# Altium PCB PCB1.PcbDoc
Units mm, origin at the board's own origin, x right, y up, seen from the top; angles counter-clockwise.
Board outline 39.6 x 42.1 mm, 4 copper layers (Top Layer, GND, VCC, Bottom Layer), stack 0.603 mm thick; 49 components, 43 nets, 249 pads, 94 vias.
Unrouted connection lines stored in the file: 155.
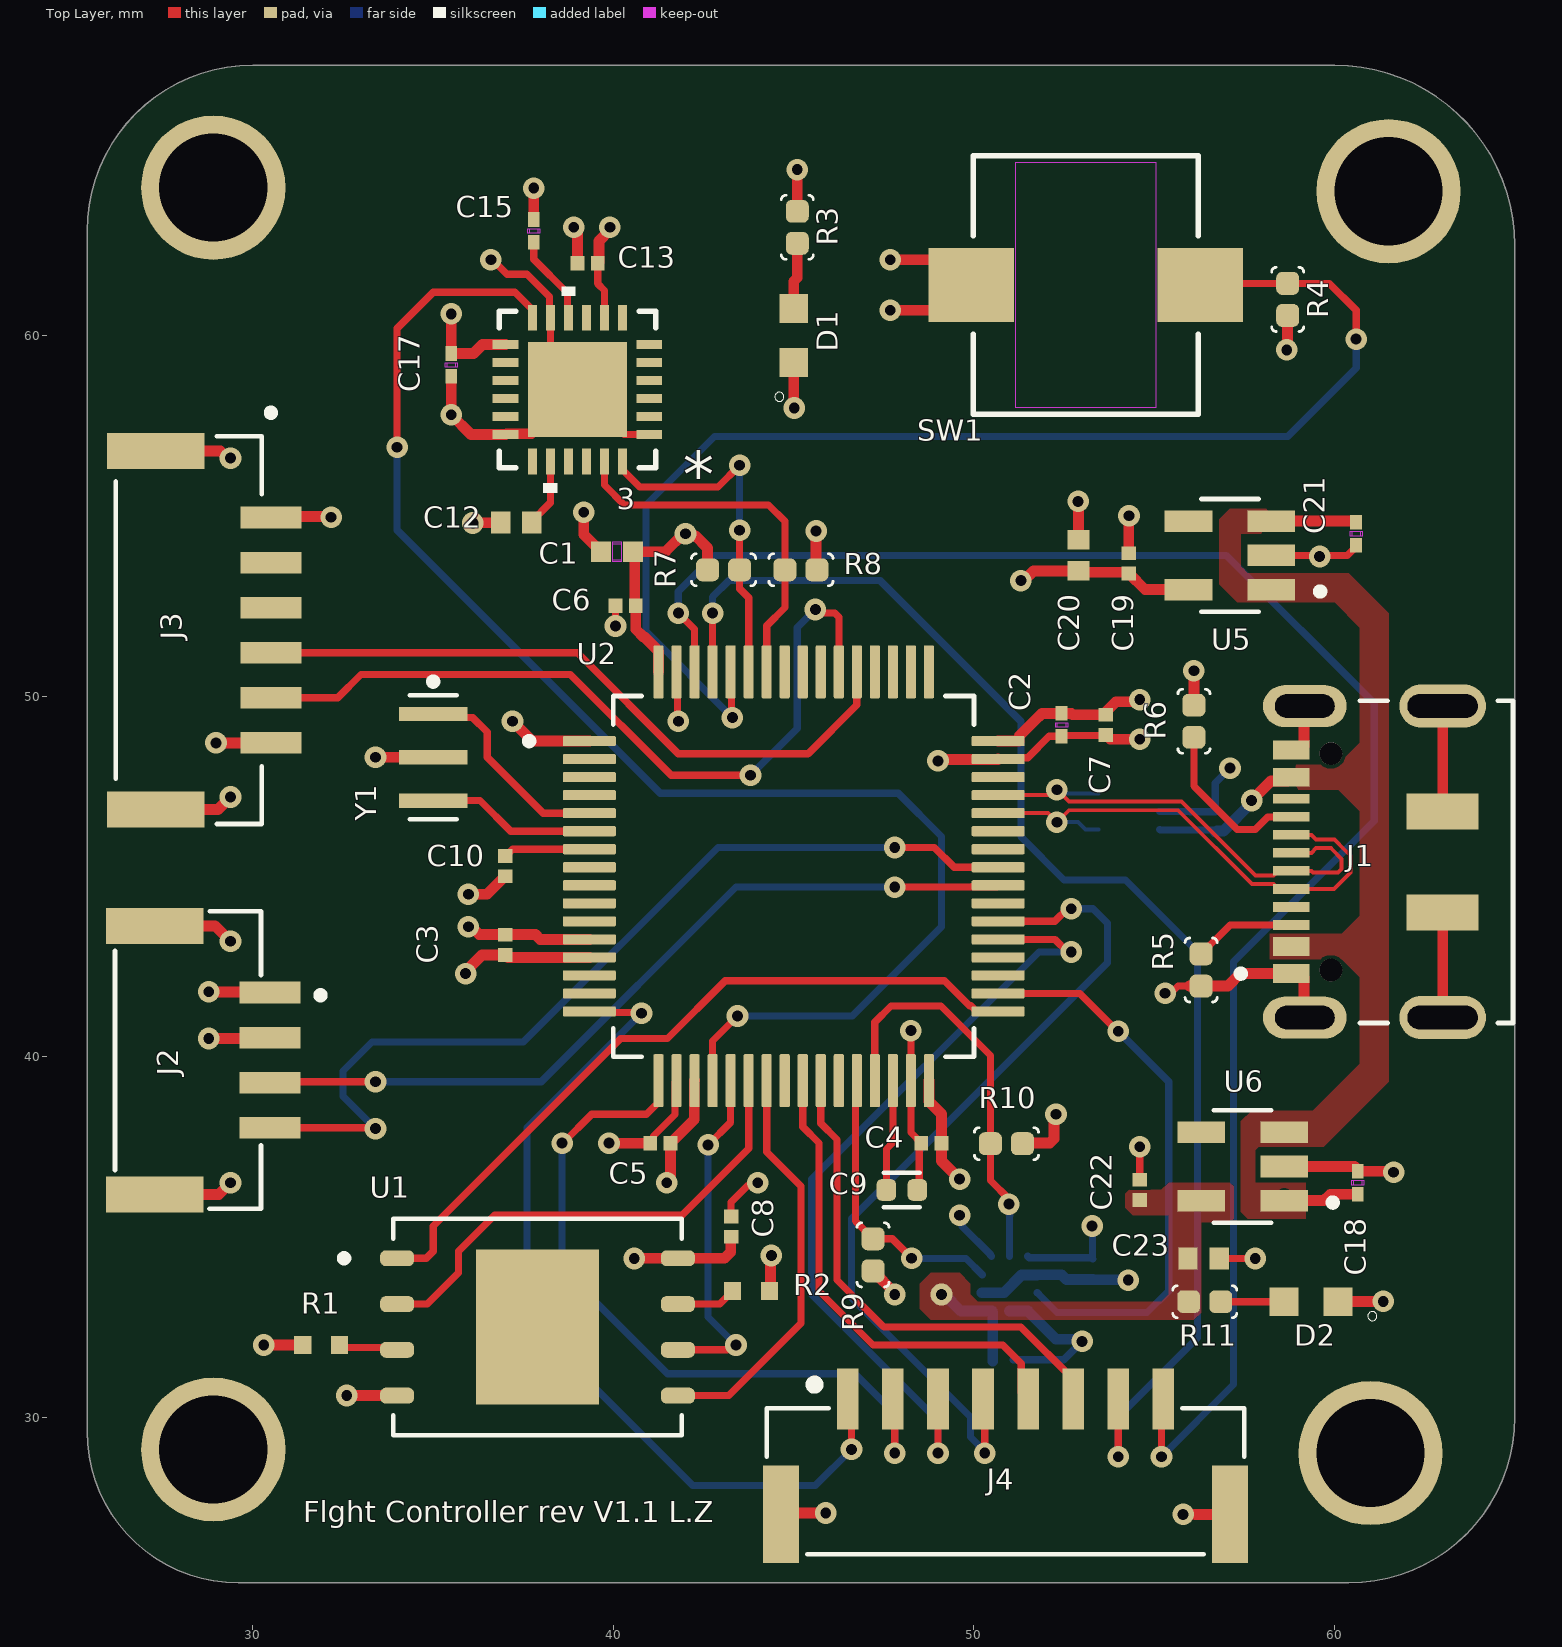
[diagram p0: Top Layer view]
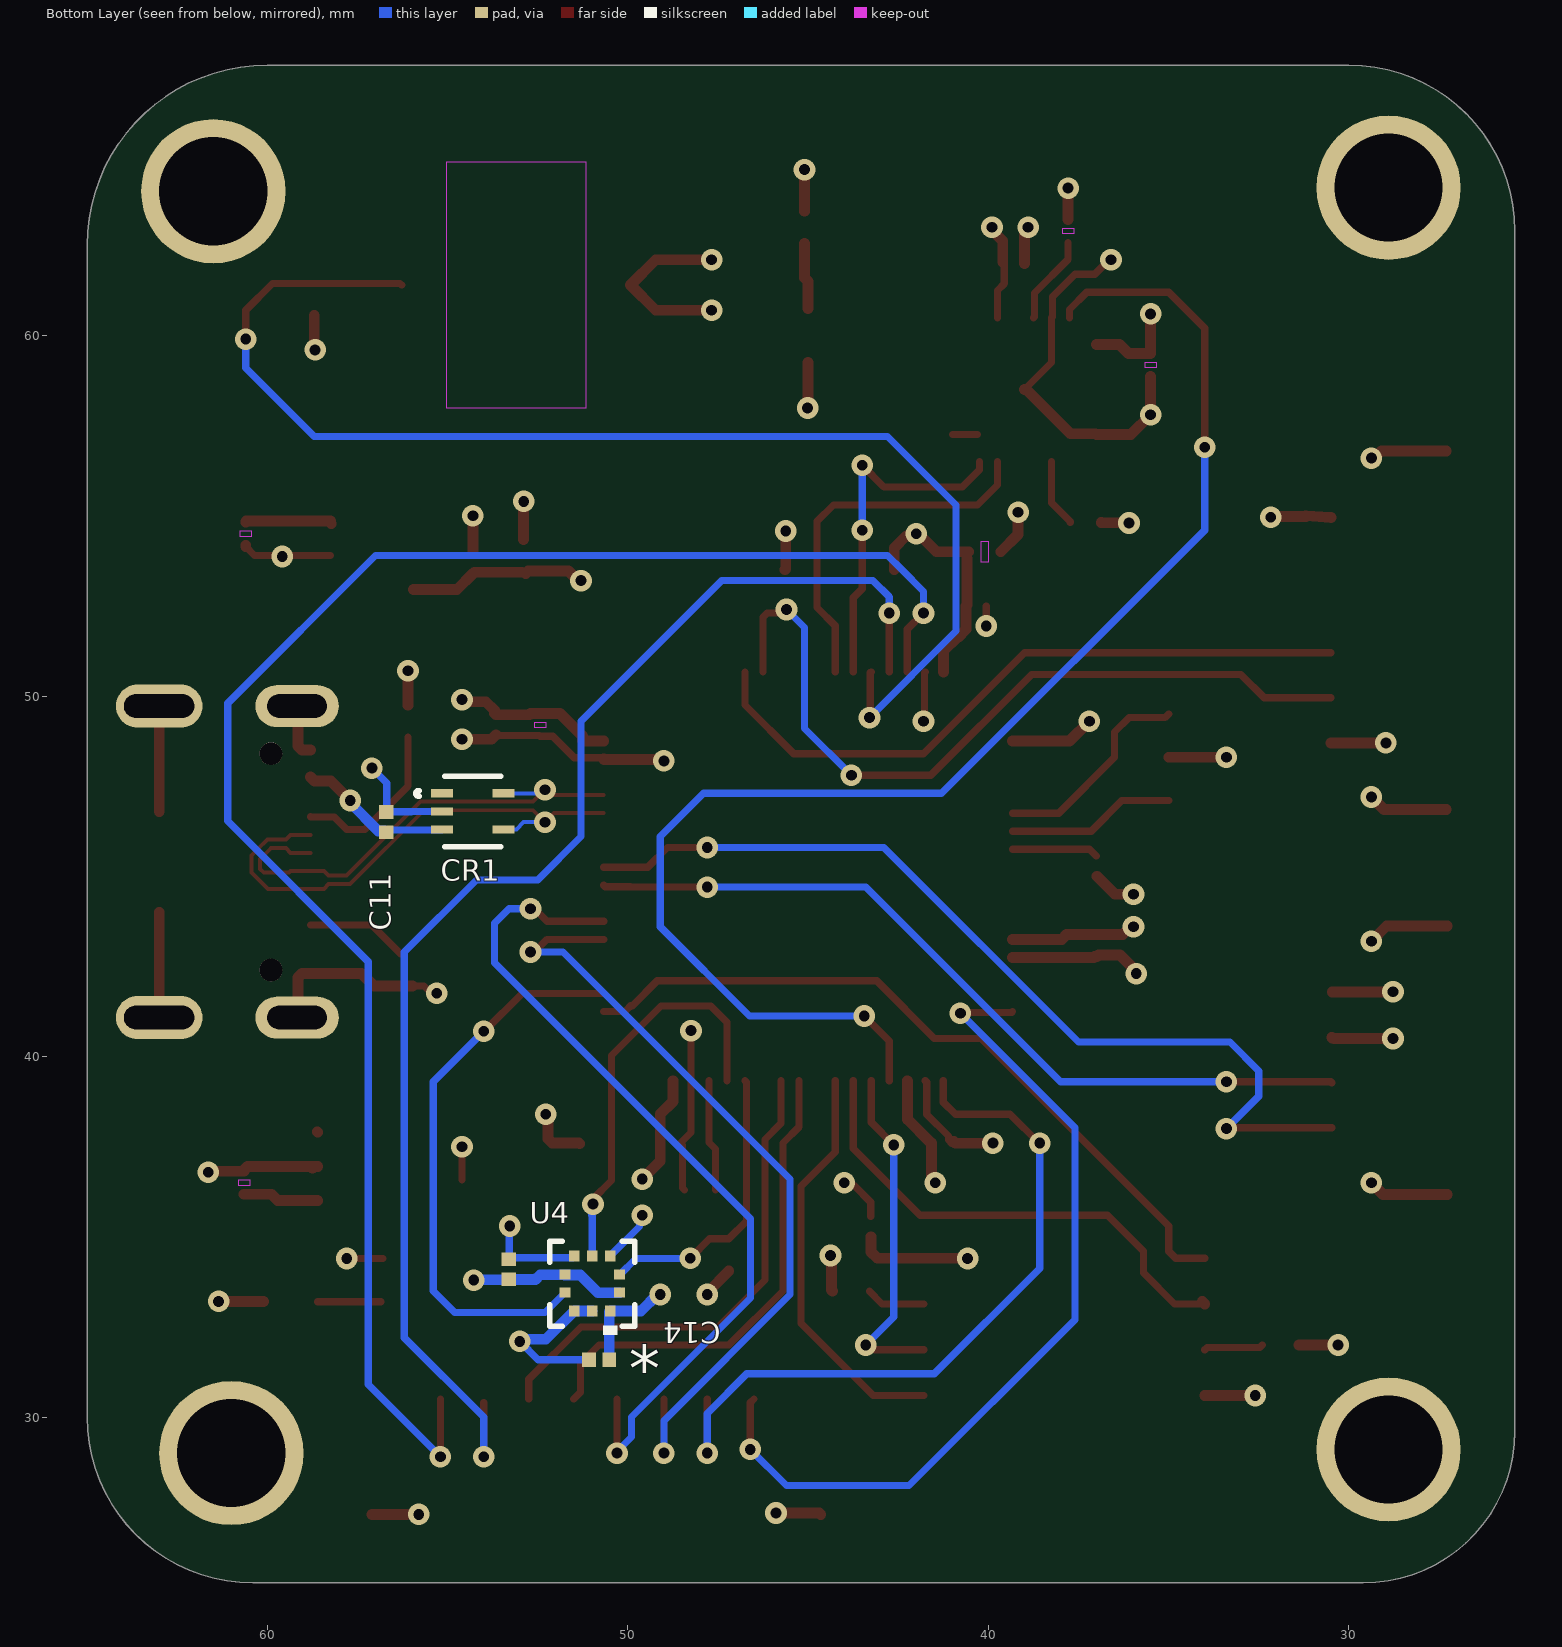
[diagram p1: Bottom Layer view, seen from below]
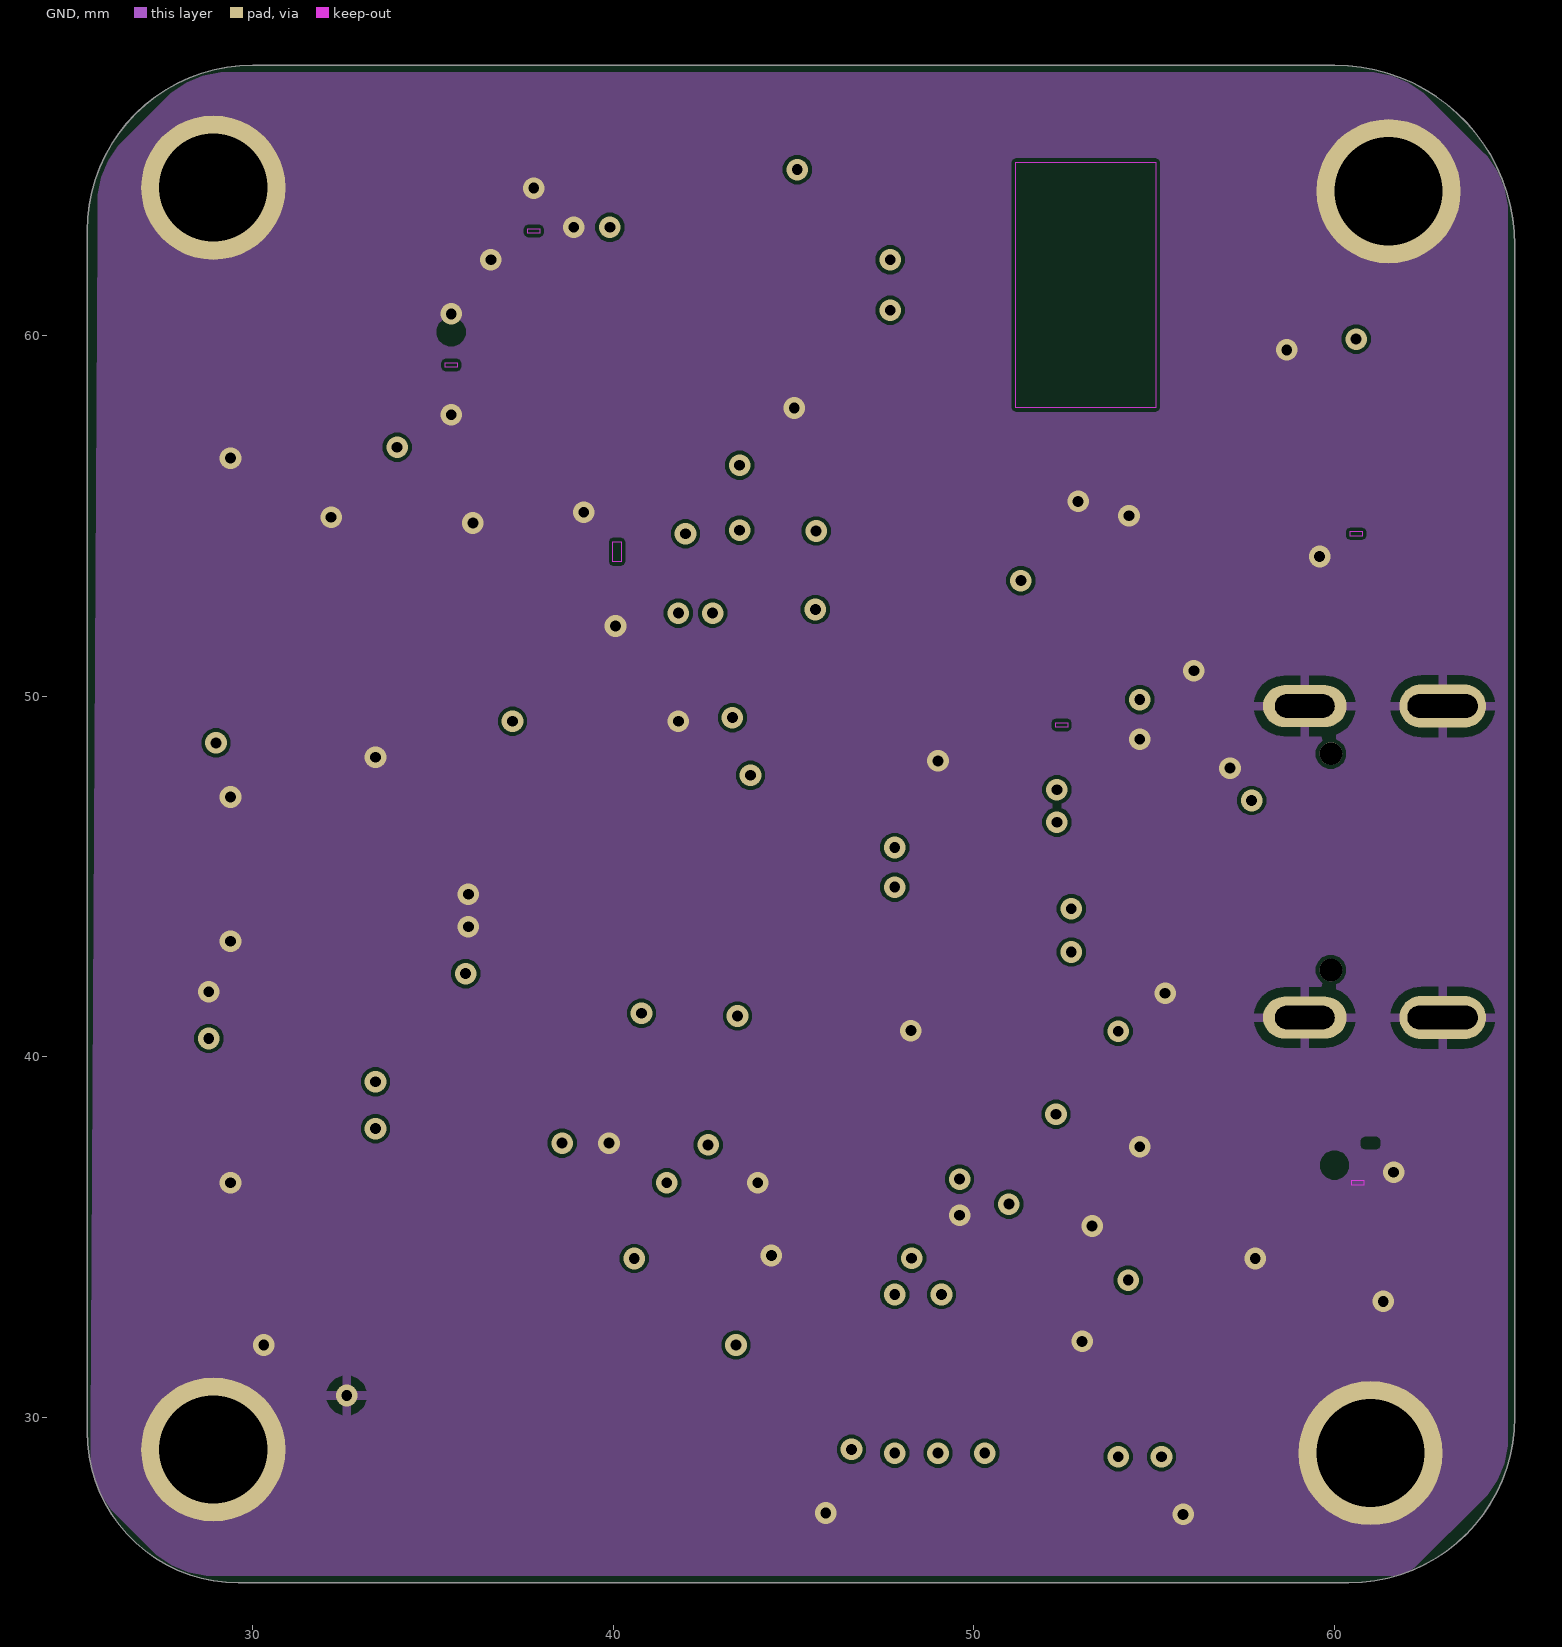
[diagram p2: GND]
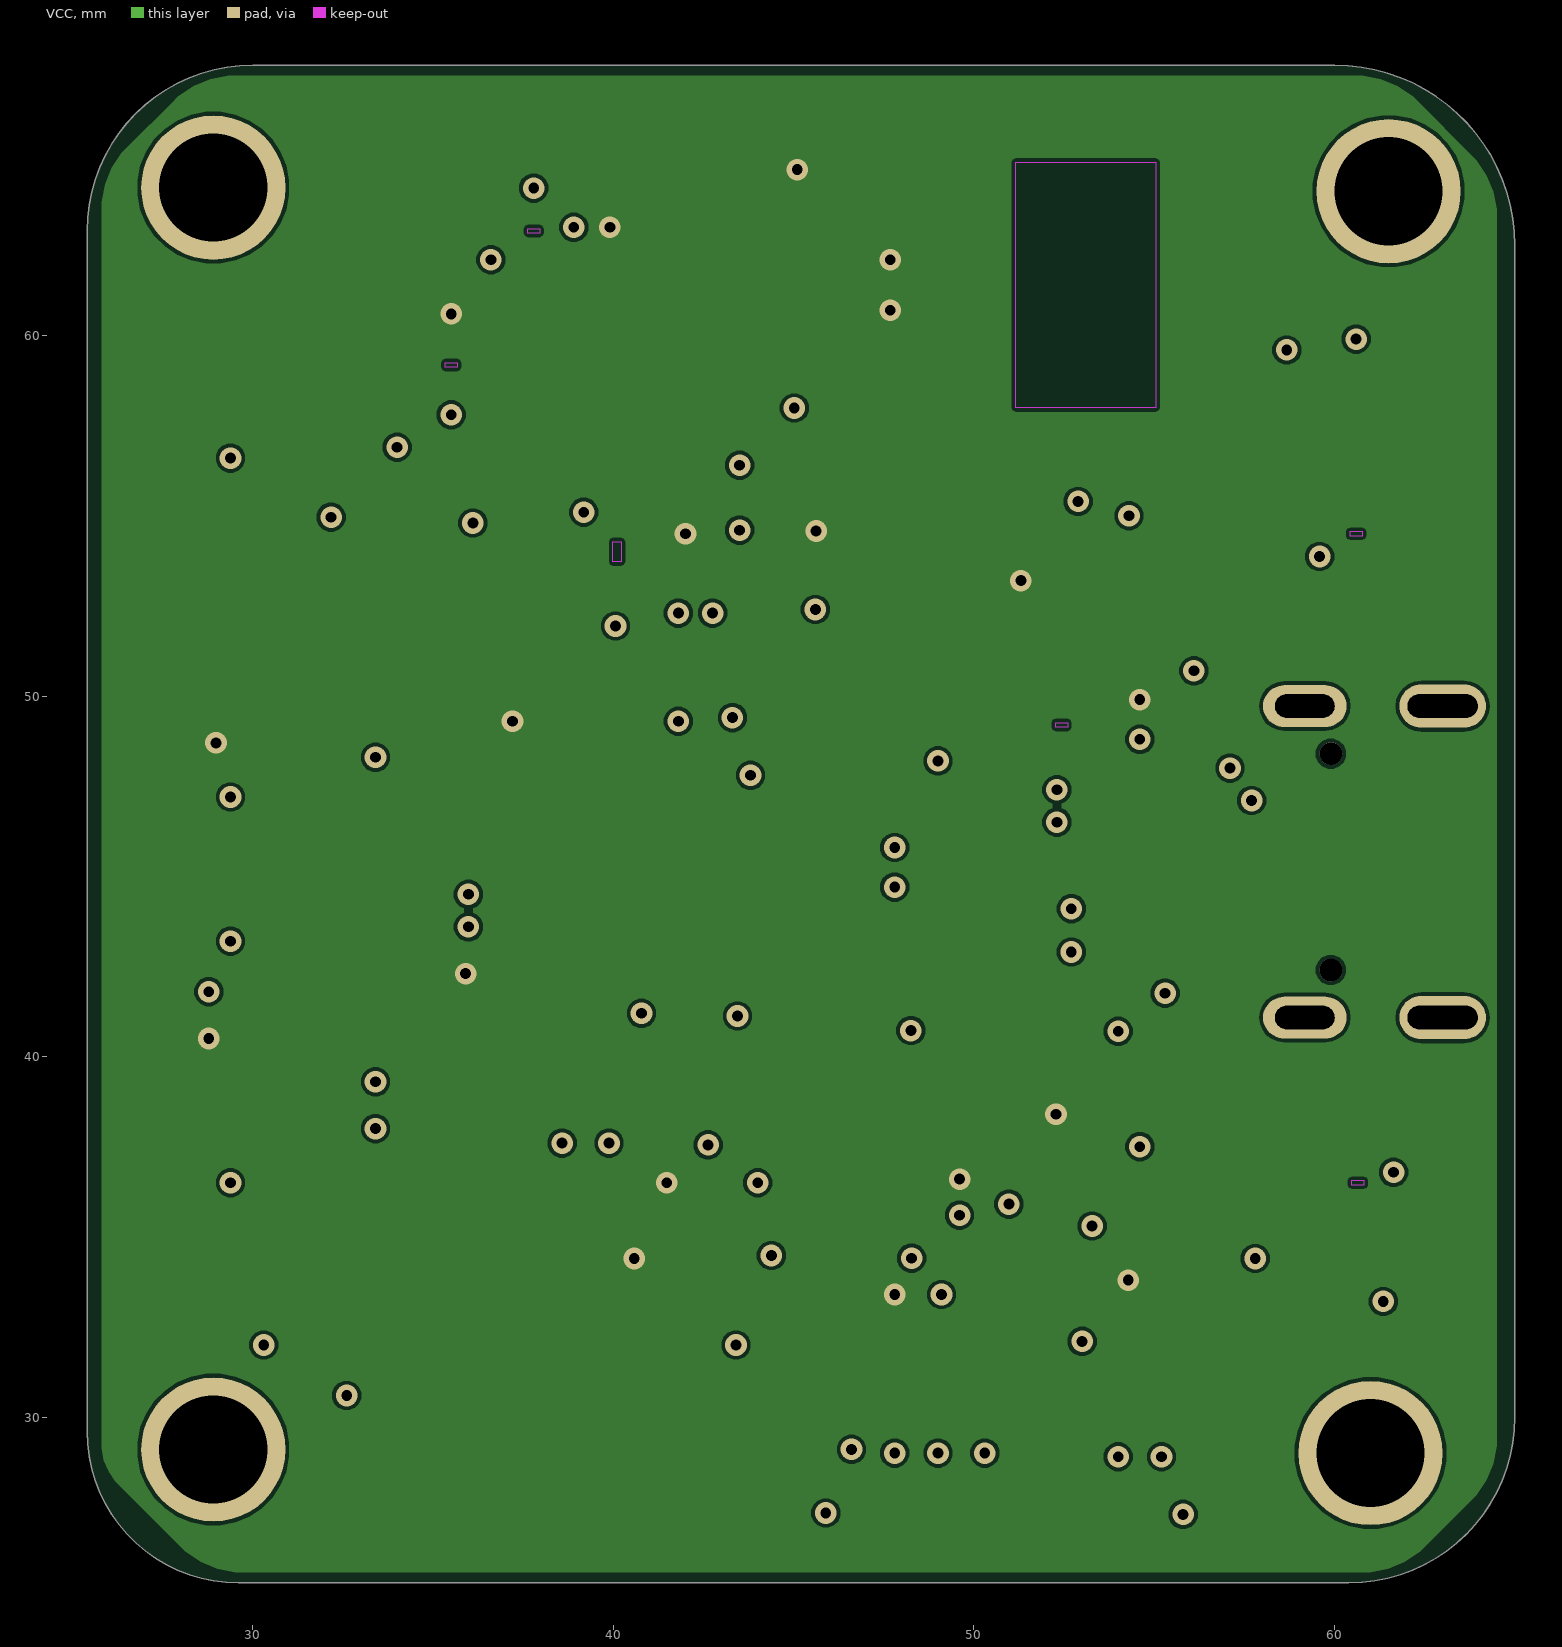
[diagram p3: VCC]
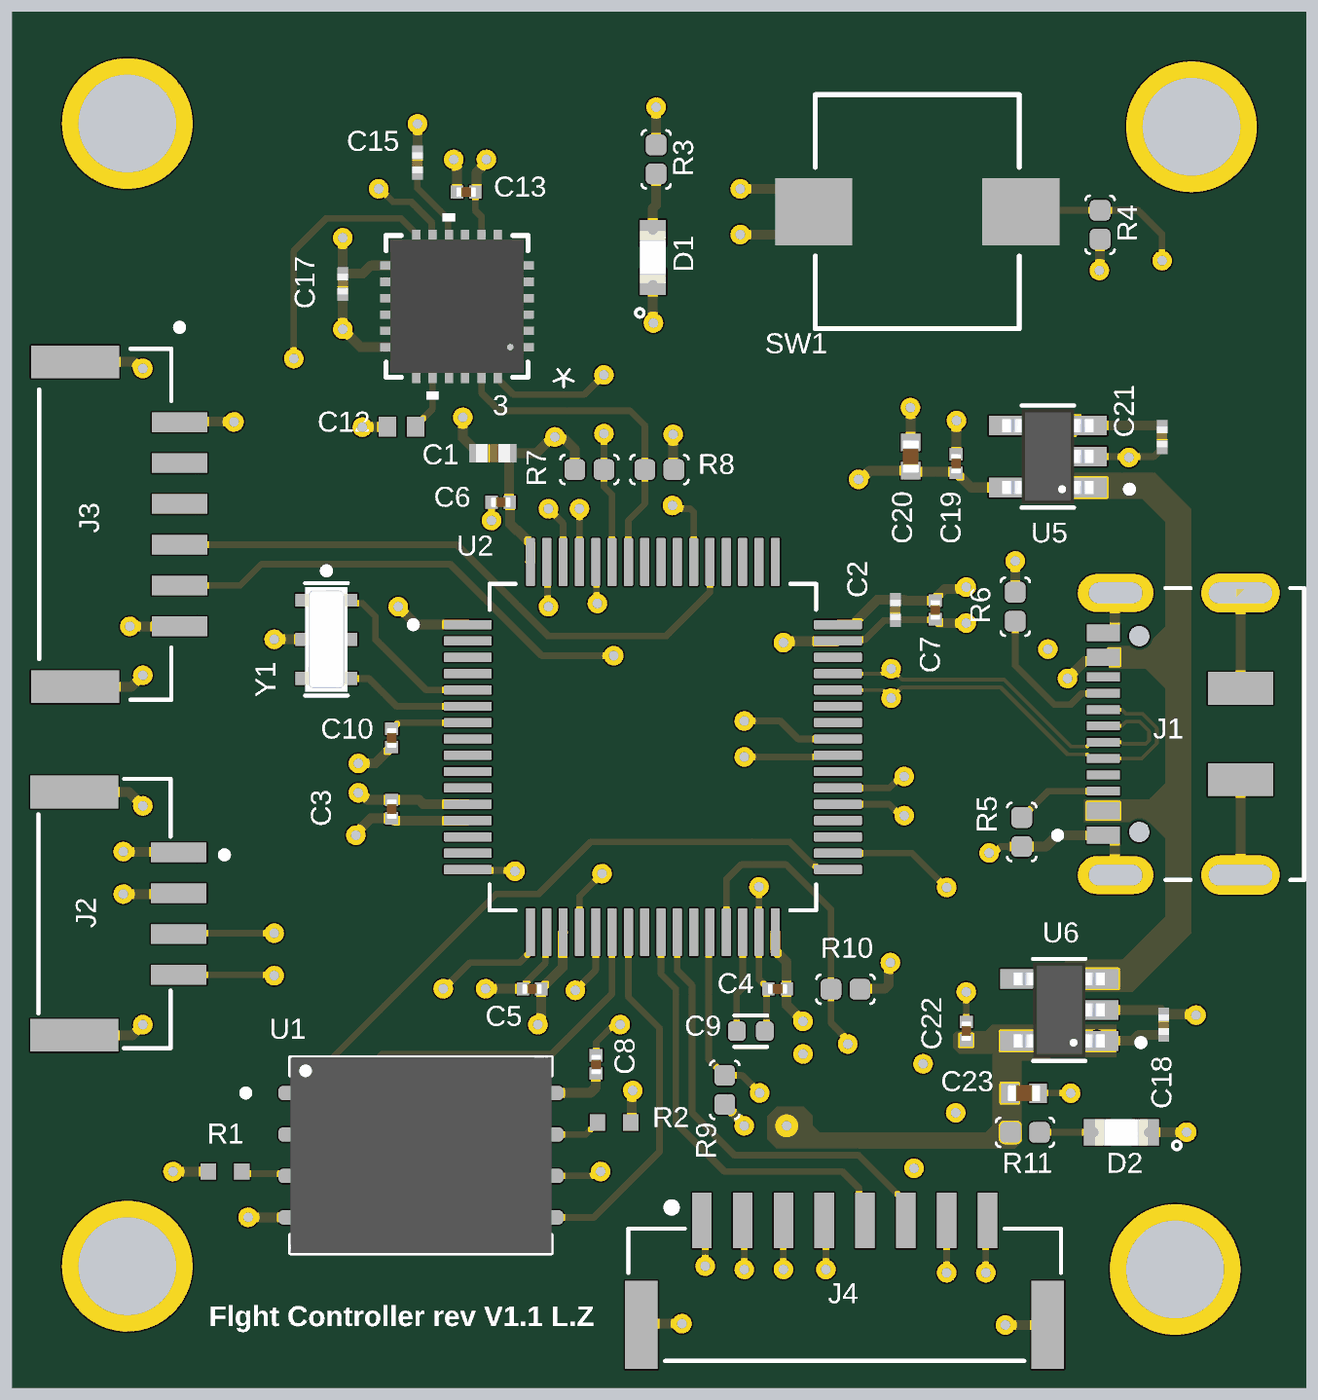
[diagram p4: 3D render of the assembled board from above, using the file's embedded part models]
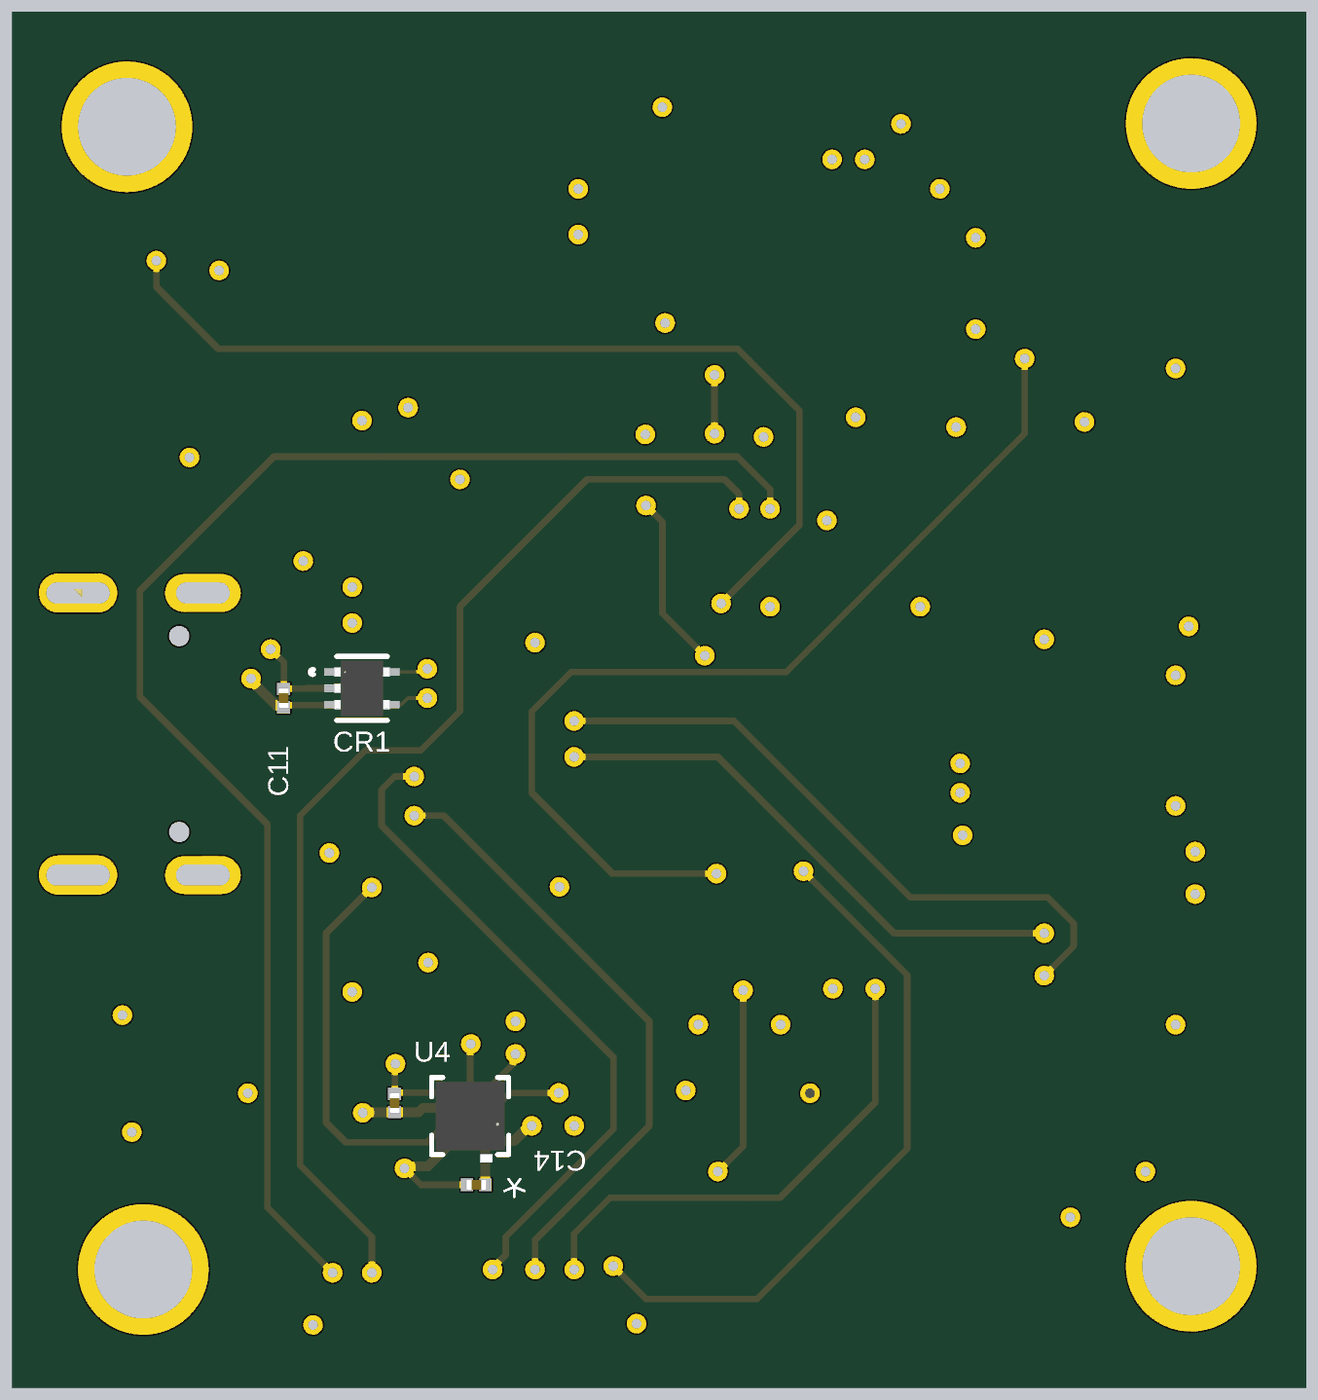
[diagram p5: 3D render of the assembled board from below, using the file's embedded part models]

## Layer stack, top to bottom
Top Solder: solder mask 0.0102, Solder Resist, Dk 3.5
Top Layer: signal copper 0.0356
Dielectric 2: prepreg 0.0711, PP-006, Dk 4.1
GND: signal copper 0.035
Dielectric 1: dielectric 0.32, FR-4, Dk 4.8
VCC: signal copper 0.035
Dielectric 3: prepreg 0.0711, PP-006, Dk 4.1
Bottom Layer: signal copper 0.0356
Bottom Solder: solder mask 0.0102, Solder Resist, Dk 3.5

## Board outline
29.6,25.4 60.4,25.4 ccw(c60.4,30) 65,30 65,62.5 ccw(c60,62.5) 60,67.5 30,67.5 ccw(c30,62.9) 25.4,62.9 25.4,29.6 ccw(c29.6,29.6)

## Design rules (kind name [scope] priority, off if disabled: settings)
Clearance [All] p1: gap=0 ignorepadtopadclearanceinfootprint=TRUE
ComponentClearance [All] p1: gap=0 collisioncheckmode=3 verticalgap=0 showdistances=FALSE
DiffPairsRouting DiffPair_90DiffPairsRouting [InDifferentialPair ('USB')] p1: maxlimit=0.127 minlimit=0.127 mostfreqgap=0.127 toplayer_minwidth=0.11 toplayer_maxwidth=0.11 toplayer_prefwidth=0.11 bottomlayer_minwidth=0.11 bottomlayer_maxwidth=0.11 bottomlayer_prefwidth=0.11 impedanceprofiledriven=TRUE impedanceprofileid={8AAA7F12-7C3F-4F63-B3B7-4EC10B9BF4EF} impedanceprofilevalue=90.000000 maxuncoupledlength=12.7
DiffPairsRouting [All] p2: maxlimit=0.254 minlimit=0.254 mostfreqgap=0.254 toplayer_minwidth=0.381 toplayer_maxwidth=0.381 toplayer_prefwidth=0.381 midlayer1_minwidth=0.381 midlayer1_maxwidth=0.381 midlayer1_prefwidth=0.381 midlayer2_minwidth=0.381 midlayer2_maxwidth=0.381 midlayer2_prefwidth=0.381 bottomlayer_minwidth=0.381 bottomlayer_maxwidth=0.381 bottomlayer_prefwidth=0.381 maxuncoupledlength=12.7
Height [All] p1 off: minheight=0 maxheight=25.4 prefheight=12.7
HoleSize [All] p1: absolutevalues=TRUE maxlimit=4 minlimit=0.025 maxpercent=80.000 minpercent=20.000
HoleToHoleClearance [All] p1: gap=0.2 allowstackedmicrovias=TRUE
MatchedLengths DiffPair_90MatchedLengths [InDifferentialPair ('USB')] p1: tolerance=25.4 checknetsindiffpair=FALSE checkdiffpairvsdiffpair=TRUE checkxsignals=TRUE checkothers=TRUE
MinimumSolderMaskSliver [All] p1: minsoldermaskwidth=0.05
PolygonConnect [All] p1: connectstyle=Relief reliefconductorwidth=0.254 reliefentries=4 polygonreliefangle="90 Angle" airgapwidth=0.254
RoutingVias [All] p1: holewidth=0.711 width=1.27 viastyle="Through Hole" minholewidth=0.711 minwidth=1.27 maxholewidth=0.711 maxwidth=1.27
SilkToSilkClearance [All] p1: silktosilkclearance=0.05
SilkToSolderMaskClearance [IsPad] p1: minsilkscreentomaskgap=0.05 clearancetoexposedcopper=TRUE
SolderMaskExpansion [All] p1: expansion=0.05 istentingtop=FALSE
Width [All] p1: maxlimit=0.3 minlimit=0.15 preferedwidth=0.2
22 further rules are at their usual default settings.

## Classes and differential pairs
component class Sensors: C12 C13 C14 C15 C17 J2 J3 J4 R7 R8 R9 R10 U4
component class "Power Distribution": C18 C19 C20 C21 C22 C23 D2 R11
component class Microcontroller+Memory: C1 C2 C3 C4 C5 C6 C7 C8 C9 C10 C11 CR1 D1 J1 R1 R2 R3 R4 R5 R6 SW1 U1 Y1
differential pair USB: +USB_P -USB_N

## Components (designator, comment, footprint, x,y, rotation, side; value= is the part's Value field where it differs from the comment)
3 "MPU-6000" QFN24_4X4X0P9_IVS 39,58.5 r180 top (schematic designator U3)
C1 "CC0402MRX5R6BB106" CAP_CC0402_YAG 40.1,54 r0 top
C2 "CC0201MRX5R6BB105" CAP_CC0201_YAG 52.43,49.2 r90 top
C3 "GRM033R61A104KE15D" CAPC0603X33N 37,43.1 r270 top
C4 "GRM033R61A104KE15D" CAPC0603X33N 48.819,37.593 r0 top
C5 "GRM033R61A104KE15D" CAPC0603X33N 41.3,37.593 r0 top
C6 "GRM033R61A104KE15D" CAPC0603X33N 40.339,52.5 r0 top
C7 "GRM033R61A104KE15D" CAPC0603X33N 53.652,49.2 r90 top
C8 "GRM033R61A104KE15D" CAPC0603X33N 43.262,35.281 r270 top
C9 "CC0402MRX5R6BB475" CAPC1005X55N#1 48,36.3 r180 top
C10 "GRM033R61A104KE15D" CAPC0603X33N 37,45.281 r270 top
C11 "GRM033R61A104KE15D" CAPC0603X33N 56.7,46.5 r270 bottom
C12 "GRM155R70J222KA01D" CAPC1005X55N#2 37.3,54.813 r0 top
C13 "GRM033R71A103KA01D" CAPC0603X33N 39.281,62 r0 top
C14 "GRM033R61A104KE15D" CAPC0603X33N 50.8,31.593 r180 bottom
C15 "CC0201MRX5R6BB105" CAP_CC0201_YAG 37.788,62.9 r270 top
C16 "GRM033R61A104KE15D" CAPC0603X33N 53.3,34.1 r270 bottom
C17 "CC0201MRX5R6BB105" CAP_CC0201_YAG 35.5,59.183 r90 top
C18 "CC0201MRX5R6BB105" CAP_CC0201_YAG 60.646,36.5 r270 top
C19 "GRM033R71A103KA01D" CAPC0603X33N 54.288,53.681 r270 top
C20 "GRM155C80J225KE95D" CAPC1005X55N#2 52.9,53.9 r270 top
C21 "CC0201MRX5R6BB105" CAP_CC0201_YAG 60.6,54.5 r90 top
C22 "GRM033R71A103KA01D" CAPC0603X33N 54.6,36.3 r270 top
C23 "GRM155C80J225KE95D" CAPC1005X55N#2 56.368,34.4 r180 top
CR1 "SP3003-02XTG" SOT553_LTF 54.3,46.8 r180 bottom
D1 "LTST-C190KFKT" LEDM1608X80 45,60 r90 top
D2 "LTST-C190KFKT" LEDM1608X80 59.35,33.2 r180 top
J1 "DX07S016JA1R1500" JAE_DX07S016JA1R1500 59.9,45.4 r90 top
J2 "SM04B-GHS-TB(LF)(SN)-" JST_SM04B-GHS-TB(LF)(SN)- 28.2,39.9 r270 top
J3 "SM06B-GHS-TB(LF)(SN)" JST_SM06B-GHS-TB(LF)(SN) 28.625,51.825 r270 top
J4 "SM08B-GHS-TB(LF)(SN)" JST_SM08B-GHS-TB(LF)(SN) 50.875,30.5 r0 top
R1 "ERA2AEB512X" RES_ERA2AEB512X 31.894,32 r0 top
R2 "ERA2AEB512X" RES_ERA2AEB512X 43.814,33.5 r180 top
R3 "SMD-RES-1K-5%-1/16W(0402)" R0402 45.1,63 r180 top
R4 "SMD-RES-1K-5%-1/16W(0402)" R0402 58.7,61 r180 top
R5 "SMD-RES-1K-5%-1/16W(0402)" R0402 56.3,42.4 r0 top
R6 "SMD-RES-1K-5%-1/16W(0402)" R0402 56.1,49.3 r180 top
R7 "SMD-RES-1K-5%-1/16W(0402)" R0402 43.055,53.5 r270 top value=1k
R8 "SMD-RES-1K-5%-1/16W(0402)" R0402 45.2,53.5 r90 top value=1k
R9 "SMD-RES-1K-5%-1/16W(0402)" R0402 47.2,34.5 r0 top
R10 "SMD-RES-1K-5%-1/16W(0402)" R0402 50.9,37.583 r90 top
R11 "SMD-RES-1K-5%-1/16W(0402)" R0402 56.4,33.2 r270 top
SW1 "B3AL-1002P" SW_3AL-1002P_OMR 53.1,61.4 r180 top
U1 "W25Q256JVEIQ_TR" SON127P600X800X80-9N 37.894,32.5 r0 top
U2 "STM32F722RET6" QFP50P1200X1200X160-64N 45,45 r0 top
U4 "BMP384" LGA10_2.0X2.0X0.95_BOS 50.988,33.7 r0 bottom
U5 "SPX3819M5-L-3-3" SOT95P280X145-5N 57.1,53.9 r180 top
U6 "SPX3819M5-L-3-3" SOT95P280X145-5N 57.45,36.95 r180 top
Y1 "CSTCE8M00G52-R0" OSC_CSTCE8M00G52-R0 35,48.3 r270 top

## Footprints (in the part's own frame and the unit in brackets; to place one, negate y for a bottom-side part, rotate by r counter-clockwise, add the part's x,y. Pads: shape width x height; smd on the part's side, far side on the other; paste and mask are expansions set on the pad)
CAP_CC0201_YAG [mil]
  rect 16x13 smd paste+0 mask+0: 1(-12.5,0) 2(12.5,0)
  Top Layer keep-out region: -2.5,-4.5 -2.5,4.5 2.5,4.5 2.5,-4.5
  Keep-Out Layer region: -2.5,-6.5 -2.5,6.5 2.5,6.5 2.5,-6.5
  body extent -13,-6 13,6, height 13
CAP_CC0402_YAG [mil]
  rect 22x22 smd paste+0 mask+0: 1(-17.5,0) 2(17.5,0)
  Top Layer keep-out region: -4.5,-9 -4.5,9 4.5,9 4.5,-9
  Keep-Out Layer region: -4.5,-11 -4.5,11 4.5,11 4.5,-11
  body extent -21,-11 21,11, height 22
CAPC0603X33N [mm]
  rect 0.38x0.4 smd: 1(-0.281,0) 2(0.281,0)
  body extent -0.3,-0.15 0.3,0.15, height 0.33
CAPC1005X55N#1 [mm]
  rrect53% 0.54x0.6 smd: 1(-0.43,0) 2(0.43,0)
  silkscreen extent -0.5,-0.48 0.5,0.48
CAPC1005X55N#2 [mm]
  rect 0.54x0.6 smd: 1(-0.432,0) 2(0.432,0)
JAE_DX07S016JA1R1500 [mm]
  rect 0.52x1 smd: 1(-3.1,1.1) 2(-2.35,1.1) 11(2.35,1.1) 12(3.1,1.1)
  rect 0.27x1 smd: 3(-1.75,1.1) 4(-1.25,1.1) 5(-0.75,1.1) 6(-0.25,1.1) 7(0.25,1.1) 8(0.75,1.1) 9(1.25,1.1) 10(1.75,1.1)
  rect 1x2 smd: S1(-1.4,-3.1) S2(1.4,-3.1)
  oval 1.158x2.316 hole 0.65 slot 1.65 at 90 deg: S3(-4.32,0.725) S4(4.32,0.725)
  oval 1.2x2.4 hole 0.65 slot 1.95 at 90 deg: S5(-4.32,-3.1) S6(4.32,-3.1)
  round 0.63 hole 0.63 unplated: ""(-3,0) ""(3,0)
  round 0.6 hole 0.6 unplated: ""(3,0)
  silkscreen extent -4.47,-5.05 4.47,2.6
JST_SM04B-GHS-TB(LF)(SN)- [mm]
  rect 0.6x1.7 smd: 1(-1.875,2.275) 2(-0.625,2.275) 3(0.625,2.275) 4(1.875,2.275)
  rect 1x2.7 smd: SH1(-3.725,-0.925) SH2(3.725,-0.925)
  silkscreen extent -4.13,-2.02 4.13,3.77
JST_SM06B-GHS-TB(LF)(SN) [mm]
  rect 0.6x1.7 smd: 1(-3.125,1.875) 2(-1.875,1.875) 3(-0.625,1.875) 4(0.625,1.875) 5(1.875,1.875) 6(3.125,1.875)
  rect 1x2.7 smd: S1(-4.975,-1.325) S2(4.975,-1.325)
  silkscreen extent -6.13,-2.42 5.38,1.97
JST_SM08B-GHS-TB(LF)(SN) [mm]
  rect 0.6x1.7 smd: 1(-4.375,0) 2(-3.125,0) 3(-1.875,0) 4(-0.625,0) 5(0.625,0) 6(1.875,0) 7(3.125,0) 8(4.375,0)
  rect 1x2.7 smd: SH1(-6.225,-3.2) SH2(6.225,-3.2)
  silkscreen extent -6.63,-4.3 6.63,0.5
LEDM1608X80 [mm]
  rect 0.8x0.8 smd: A(0.75,0) C(-0.75,0)
  silkscreen extent -1.83,0.27 -1.57,0.53, body extent -0.8,-0.4 0.8,0.4, height 0.8
LGA10_2.0X2.0X0.95_BOS [mil]
  rect 12x11 smd paste+0 mask+0: 1(-30,9.84) 2(-30,-9.84) 6(30,-9.84) 7(30,9.84)
  rect 11x12 smd paste+0 mask+0: 3(-19.69,-30) 4(0,-30) 5(19.68,-30) 8(19.68,30) 9(0,30) 10(-19.69,30)
  silkscreen extent -46,-46 46,56, body extent -41,-41 41,41, height 39
OSC_CSTCE8M00G52-R0 [mm]
  rect 0.4x1.9 smd: 1(-1.2,0) 2(0,0) 3(1.2,0)
  silkscreen extent -2.2,-0.65 1.72,0.65, body extent -1.6,-0.65 1.6,0.65, height 0.8
QFN24_4X4X0P9_IVS [mil]
  rect 28x10 smd paste+0 mask+0: 1(-78.5,49.21) 2(-78.5,29.53) 3(-78.5,9.84) 4(-78.5,-9.84) 5(-78.5,-29.53) 6(-78.5,-49.21) 13(78.5,-49.21) 14(78.5,-29.53) 15(78.5,-9.84) 16(78.5,9.84) 17(78.5,29.53) 18(78.5,49.21)
  rect 10x28 smd paste+0 mask+0: 7(-49.21,-78.5) 8(-29.53,-78.5) 9(-9.84,-78.5) 10(9.84,-78.5) 11(29.53,-78.5) 12(49.21,-78.5) 19(49.21,78.5) 20(29.53,78.5) 21(9.84,78.5) 22(-9.84,78.5) 23(-29.53,78.5) 24(-49.21,78.5)
  rect 108x104 smd paste-52 mask+0: 25(0,0)
  silkscreen extent -86,-112 86,112, body extent -81,-81 81,81, height 37
QFP50P1200X1200X160-64N [mm]
  rrect25% 1.47x0.28 smd: 1(-5.67,3.75) 2(-5.67,3.25) 3(-5.67,2.75) 4(-5.67,2.25) 5(-5.67,1.75) 6(-5.67,1.25) 7(-5.67,0.75) 8(-5.67,0.25) 9(-5.67,-0.25) 10(-5.67,-0.75) 11(-5.67,-1.25) 12(-5.67,-1.75) 13(-5.67,-2.25) 14(-5.67,-2.75) 15(-5.67,-3.25) 16(-5.67,-3.75) 33(5.67,-3.75) 34(5.67,-3.25) 35(5.67,-2.75) 36(5.67,-2.25) 37(5.67,-1.75) 38(5.67,-1.25) 39(5.67,-0.75) 40(5.67,-0.25) 41(5.67,0.25) 42(5.67,0.75) 43(5.67,1.25) 44(5.67,1.75) 45(5.67,2.25) 46(5.67,2.75) 47(5.67,3.25) 48(5.67,3.75)
  rrect25% 0.28x1.47 smd: 17(-3.75,-5.67) 18(-3.25,-5.67) 19(-2.75,-5.67) 20(-2.25,-5.67) 21(-1.75,-5.67) 22(-1.25,-5.67) 23(-0.75,-5.67) 24(-0.25,-5.67) 25(0.25,-5.67) 26(0.75,-5.67) 27(1.25,-5.67) 28(1.75,-5.67) 29(2.25,-5.67) 30(2.75,-5.67) 31(3.25,-5.67) 32(3.75,-5.67) 49(3.75,5.67) 50(3.25,5.67) 51(2.75,5.67) 52(2.25,5.67) 53(1.75,5.67) 54(1.25,5.67) 55(0.75,5.67) 56(0.25,5.67) 57(-0.25,5.67) 58(-0.75,5.67) 59(-1.25,5.67) 60(-1.75,5.67) 61(-2.25,5.67) 62(-2.75,5.67) 63(-3.25,5.67) 64(-3.75,5.67)
  silkscreen extent -7.44,-5 5,5
R0402 [mil]
  rrect50% 25x25 smd: 1(0,17.5) 2(0,-17.5)
  silkscreen extent -18,-35 18,35
RES_ERA2AEB512X [mm]
  rect 0.475x0.5 smd: 1(-0.512,0) 2(0.512,0)
SON127P600X800X80-9N [mm]
  rrect70% 0.94x0.44 smd: 1(-3.895,1.905) 2(-3.895,0.635) 3(-3.895,-0.635) 4(-3.895,-1.905) 5(3.895,-1.905) 6(3.895,-0.635) 7(3.895,0.635) 8(3.895,1.905)
  rect 3.4x4.3 smd paste-3: 9(0,0)
  silkscreen extent -5.46,-3 4,3, body extent -4,-3 4,3, height 0.8
SOT95P280X145-5N [mm]
  rect 1.32x0.6 smd: 1(-1.15,0.95) 2(-1.15,0) 3(-1.15,-0.95) 4(1.15,-0.95) 5(1.15,0.95)
  silkscreen extent -2.6,-1.56 0.8,1.56, body extent -1.4,-1.45 1.4,1.45, height 1.45
SOT553_LTF [mil]
  rect 24x9 smd paste+0 mask+0: 1(-33.5,19.69) 2(-33.5,0) 3(-33.5,-19.69) 4(33.5,-19.68) 5(33.5,19.68)
  silkscreen extent -62,-39 31,39, body extent -34,-34 34,34, height 24
SW_3AL-1002P_OMR [mil]
  rect 93x81 smd paste+0 mask+0: 1(-125,0) 2(125,0)
  Top Layer keep-out region: -76.5,-134 -76.5,134 76.5,134 76.5,-134
  Keep-Out Layer region: -76.5,-134 -76.5,134 76.5,134 76.5,-134
  silkscreen extent -123,-141 123,141

## Part data
3: "No Description Available", Mfr_Name=InvenSense, RefDes=RefDes, Type=Type
C1 C2 C15 C17 C18 C21: "No Description Available", Mfr_Name=Yageo
C3 C4 C5 C6 C7 C8 C10 C11 C14 C16: "SMD capacitor X5R(EIA) with capacitance 0.10uF Tol.10%. Rated voltage 10Vdc 85C", Package="0603 Taiyo Yuden", Availability=Warning, Check_prices=https://www.snapeda.com/parts/GRM033R61A104KE15D/Murata%20Electronics%20North%20America/view-part/104758/?ref=eda, MF="Murata Electronics", MP=GRM033R61A104KE15D, Price=None, Purchase-URL=https://pricing.snapeda.com/search/part/GRM033R61A104KE15D/?ref=eda, SnapEDA_Link=https://www.snapeda.com/parts/GRM033R61A104KE15D/Murata%20Electronics%20North%20America/view-part/104758/?ref=snap
C9: "0402 4700000 pF 10 V Â±20 % Tol. X5R Surface Mount Multilayer Ceramic Capacitor", Package=None, Availability=Unavailable, MP=CC0402MRX5R6BB475, Price=None
C12: "Cap Ceramic 0.0022uF 6.3V X7R 10% SMD 0402 125Â°C Paper T/R", Package=None, Availability=Unavailable, MP=GRM155R70J222KA01D, Price=None
C13 C19 C22: "SMD Capacitor X7R(EIA) with Capacitance: 10000pF Tol. 10%. Rated Voltage: 10Vdc", Package="0603 Taiyo Yuden", Availability=Unavailable, Check_prices=https://www.snapeda.com/parts/GRM033R71A103KA01D/Murata/view-part/4379446/?ref=eda, MF=Murata, MP=GRM033R71A103KA01D, Price=None, SnapEDA_Link=https://www.snapeda.com/parts/GRM033R71A103KA01D/Murata/view-part/4379446/?ref=snap
C20 C23: "2.2ÂµF Â±10% 6.3V Ceramic Capacitor X6S 0402 (1005 Metric)", Package="1005 Taiyo Yuden", Check_prices=https://www.snapeda.com/parts/GRM155C80J225KE95D/Murata%20Electronics%20North%20America/view-part/1764715/?ref=eda, Digi-Key_Part_Number=490-10012-1-ND, MF=Murata, MP=GRM155C80J225KE95D, Purchase-URL=https://pricing.snapeda.com/search/part/GRM155C80J225KE95D/?ref=eda, SnapEDA_Link=https://www.snapeda.com/parts/GRM155C80J225KE95D/Murata%20Electronics%20North%20America/view-part/1764715/?ref=snap
CR1: "No Description Available", Mfr_Name="Littelfuse Inc", RefDes=RefDes, Type=Type
D1 D2: "LED Uni-Color Orange 611nm 2-Pin Chip LED T/R", Package="0603 Lite-On", Availability="In Stock", Check_prices=https://www.snapeda.com/parts/LTST-C190KFKT/Applied+Avionics/view-part/?ref=eda, MF="Lite-On Electronics", MP=LTST-C190KFKT, Price=None, Purchase-URL=https://pricing.snapeda.com/search/part/LTST-C190KFKT/?ref=eda, SnapEDA_Link=https://www.snapeda.com/parts/LTST-C190KFKT/Applied+Avionics/view-part/?ref=snap
J1: "USB-C (USB TYPE-C) USB 2.0 Receptacle Connector 24 (16+8 Dummy) Position Surface Mount, Right Angle; Through Hole", Package=None, Availability=Unavailable, MP=DX07S016JA1R1500, Price=None
J2: "Connector Header Surface Mount, Right Angle 4 position 0.049 _1.25mm_", Package=None, Availability=Unavailable, MF="JST Sales", MP=SM04B-GHS-TB_LF__SN_-, Price=None, SnapEDA_Link=https://www.snapeda.com/parts/SM04B-GHS-TB%28LF%29%28SN%29-/JST%20Sales%20America%20Inc./view-part/2759740/?ref=snap
J3: "ÐŸÐ¾Ð²ÐµÑ€Ñ…Ð½Ð¾ÑÑ‚Ð½Ñ‹Ð¹ Ð¼Ð¾Ð½Ñ‚Ð°Ð¶ Ñ€Ð°Ð·ÑŠÐµÐ¼Ð°, Ð¿Ñ€ÑÐ¼Ð¾Ð¹ ÑƒÐ³Ð¾Ð» 6, Ð¿Ð¾Ð»Ð¾Ð¶ÐµÐ½Ð¸Ðµ 0,049 _1,25 Ð¼Ð¼_", Package=None, Availability=Unavailable, MF="JST Sales", MP=SM06B-GHS-TB_LF__SN_, Price=None, SnapEDA_Link=https://www.snapeda.com/parts/SM06B-GHS-TB%28LF%29%28SN%29/JST%20Sales%20America%20Inc./view-part/817690/?ref=snap
J4: "Connector Header Surface Mount, Right Angle 8 position 0.049 _1.25mm_", Package=None, Digi-Key_Part_Number=455-1570-1-ND, Digi-Key_Purchase_URL=https://www.digikey.com/product-detail/en/jst-sales-america-inc/SM08B-GHS-TB_LF__SN_/455-1570-1-ND/807838?utm_source=snapeda&utm_medium=aggregator&utm_campaign=symbol, MF="JST Sales", MP=SM08B-GHS-TB_LF__SN_, SnapEDA_Link=https://www.snapeda.com/parts/SM08B-GHS-TB%28LF%29%28SN%29/JST%20Sales%20America%20Inc./view-part/1162121/?ref=snap
R1 R2: Package=None, Availability=Unavailable, MP=ERA2AEB512X, Price=None
R3 R4 R5 R6 R7 R8 R9 R10 R11: "1 kOhms Â±5% 0.063W, 1/16W Chip Resistor 0402 (1005 Metric) Moisture Resistant Thick Film", Package="0402 Yageo", Check_prices=https://www.snapeda.com/parts/RC0402JR-071KL/Yageo/view-part/?ref=eda, Digi-Key_Part_Number=311-1.0KJRTR-ND, MF=Yageo, MP=RC0402JR-071KL, Purchase-URL=https://pricing.snapeda.com/search/part/RC0402JR-071KL/?ref=eda, SnapEDA_Link=https://www.snapeda.com/parts/RC0402JR-071KL/Yageo/view-part/?ref=snap
SW1: "No Description Available", Mfr_Name=Omron
U1: "FLASH - NOR Memory IC 256Mb (32M x 8) SPI - Quad I/O 133 MHz 8-WSON (8x6)", Package="WSON-8 Winbond", Availability="In Stock", Check_prices=https://www.snapeda.com/parts/W25Q256JVEIQ%20TR/Winbond+Electronics/view-part/?ref=eda, MF=Winbond, MP="W25Q256JVEIQ TR", Price=None, Purchase-URL="https://pricing.snapeda.com/search/part/W25Q256JVEIQ TR/?ref=eda", SnapEDA_Link=https://www.snapeda.com/parts/W25Q256JVEIQ%20TR/Winbond+Electronics/view-part/?ref=snap
U2: "ARMÂ® CortexÂ®-M7 STM32F7 Microcontroller IC 32-Bit 216MHz 512KB _512K x 8_ FLASH 64-LQFP _10x10_", Package="LQFP-64 STMicroelectronics", Availability=Unavailable, MF=STMicroelectronics, MP=STM32F722RET6, Price=None, SnapEDA_Link=https://www.snapeda.com/parts/STM32F722RET6/STMicroelectronics/view-part/696468/?ref=snap
U4: "No Description Available", Mfr_Name="Bosch Sensortec", RefDes=RefDes, Type=Type
U5 U6: "Linear Voltage Regulator IC Positive Fixed 1 Output 500mA SOT-23-5", Package="SOT-23-5 Exar", Check_prices=https://www.snapeda.com/parts/SPX3819M5-L-3-3/TR/MaxLinear%252C+Inc./view-part/?ref=eda, MF="MaxLinear, Inc.", MP=SPX3819M5-L-3-3/TR, SnapEDA_Link=https://www.snapeda.com/parts/SPX3819M5-L-3-3/TR/MaxLinear%252C+Inc./view-part/?ref=snap
Y1: "8MHz Ceramic Resonator Built in Capacitor 10pF Â±0.2% -20Â°C ~ 80Â°C Surface Mount", Package="Surface Mount Murata Electronics North America", Availability=Bad, Check_prices=https://www.snapeda.com/parts/CSTCE8M00G52-R0/Murata%20Electronics%20North%20America/view-part/234504/?ref=eda, MF=Murata, MP=CSTCE8M00G52-R0, Price=None, SnapEDA_Link=https://www.snapeda.com/parts/CSTCE8M00G52-R0/Murata%20Electronics%20North%20America/view-part/234504/?ref=snap

## Free pads (board coordinates)
  round 4 hole 3: 65(28.9,29.1) 65(28.9,64.1) 65(61,29) 65(61.5,64)

## Via types
v1: diameter 0.6, hole 0.3, Top Layer to Bottom Layer, 94 vias

## Nets (pads, with @x,y where several pads share a name; then routed paths per layer and width w, separated by ;. In a path a pad name is that pad's centre, name@x,y a point inside that pad or via, vN(x,y) a via of type N, cw(c..) or ccw(c..) an arc to the next point about the centre after c; other vN are vias at no path point)
3V3: 3.8 3.13 C1.2 C2.2 C3.2 C4.2 C5.2 C6.2 C7.2 C8.2 C13.2 C16.2 C17.2 C19.2 C20.2 J2.2 J3.6 R3.2 R7.2 R8.2 R9.2 R10.2 SW1.2 U1.8 U2.1 U2.13 U2.19 U2.32 U2.48 U2.64 U4.1 U4.6 U5.5 | length 53.6
  Top Layer w0.2: C13.2@39.602,62.04 C13.2 39.562,61.438 39.75,61.25 3.8
  Top Layer w0.3: v1(28.776,40.499) J2.2@30.413,40.499 ; v1(28.976,48.699) J3.6 ; J2.2@30.462,40.512 J2.2 ; v1(35.5,60.6) C17.2 36.115,59.5 36.365,59.75 3.13 ; v1@35.949,42.418 36.35,42.819 36.95,42.819 36.99,42.779 C3.2@37.05,42.779 ; C3.2@37.079,42.75 U2.13 ; v1(37.2,49.3) 37.75,48.75 U2.1 ; C13.2@39.602,62.04 39.602,62.621 39.9,62.919 v1(39.9,63) ; v1@40.5,34.4 40.505,34.405 U1.8 43.078,34.405 43.254,34.581 C8.2@43.254,35 ; C1.2 41.439,54 41.939,54.5 v1(42,54.5) 42.057,54.443 42.276,54.443 42.611,54.108 R7.2 ; C1.2@40.592,53.809 40.592,52.528 C6.2 40.62,51.85 40.832,51.638 40.857,51.638 41.25,51.245 U2.64 U2.64@41.24,50.68 ; v1@41.581,36.709 C5.2@41.581,37.603 ; C5.2@41.631,37.643 42.24,38.252 42.24,39.32 U2.19 ; R3.2 v1(45.1,64.6) ; v1(45.622,54.578) 45.622,53.522 R8.2 ; R9.2 47.2,34.051 47.8,33.451 v1(47.8,33.4) ; v1@47.7,60.7 49.225,60.7 SW1.2 49.225,62.1 v1@47.7,62.1 ; U2.32 48.75,38.755 49.1,38.405 49.1,37.1 v1(49.6,36.6) ; U2.48 51.245,48.75 51.255,48.76 51.255,48.888 51.673,49.305 51.885,49.518 C2.2@52.5,49.518 ; v1(51.3,53.2) 51.381,53.2 51.649,53.468 52.764,53.468 C20.2@52.832,53.4 ; R10.2 51.364,37.603 51.903,37.603 51.9,37.6 52.1,37.6 52.219,37.719 52.219,38.342 v1(52.276,38.399) ; C2.2@52.441,49.518 52.445,49.514 52.698,49.514 52.731,49.481 53.662,49.481 C7.2@53.702,49.521 ; C20.2@52.934,53.434 C19.2@54.254,53.434 ; C7.2@53.702,49.604 53.941,49.843 v1@54.543,49.843 ; C19.2@54.298,53.4 54.748,52.95 U5.5
  Bottom Layer w0.3: U4.1 50.829,33.45 51.319,33.94 51.748,33.94 51.75,33.942 U4.6 52.431,33.95 52.562,33.819 C16.2 53.31,33.809 54.266,33.809 v1(54.276,33.799)
  other v1: 40.576,34.399 41.476,36.499 35.9,42.3 54.6,49.9 47.676,60.699 47.676,62.099
3V3_A: C14.2 C22.2 C23.2 R11.2 U4.10 U6.5 | length 3
  Bottom Layer w0.3: v1(49.1,33.4) 49.181,33.4 49.643,32.938 U4.10 50.496,32.938 50.519,32.915 C14.2@50.519,31.55
BARO_INT: U2.34 U4.7 | length 15.7
  Top Layer w0.2: U2.34 52.933,41.75 53.983,40.7 v1(54,40.7)
  Bottom Layer w0.2: U4.7 51.763,33.45 51.803,33.41 51.803,33.398 52.3,32.9 54.8,32.9 55.4,33.5 55.4,39.3 v1(54,40.7)
FLASH_CS: U1.1 U2.33 | length 20.6
  Top Layer w0.2: U1.1 34.805,34.405 35,34.6 35,35.3 40.2,40.5 41.5,40.5 43.1,42.1 49.183,42.1 49.873,41.41 49.918,41.41 50.035,41.293 50.035,41.29 50.075,41.25 U2.33
GND: 3.1 3.11 3.18 3.25 C1.1 C2.1 C3.1 C4.1 C5.1 C6.1 C7.1 C8.1 C9.1 C10.2 C11.1 C12.1 C13.1 C14.1 C15.1 C16.1 C17.1 C18.1 C19.1 C20.1 C21.1 C22.1 C23.1 CR1.2 D1.C D2.C J1.1 J1.12 J1.S1 J1.S2 J1.S3 J1.S4 J1.S5 J1.S6 J2.1 J2.SH1 J2.SH2 J3.1 J3.S1 J3.S2 J4.SH1 J4.SH2 pad.65 R1.1 R2.1 R4.1 R5.2 R6.2 U1.4 U2.12 U2.18 U2.31 U2.47 U2.63 U4.3 U4.5 U4.8 U4.9 U5.2 U6.2 Y1.2 | length 94.7
  Top Layer w0.2: v1(36.6,62.1) 36.649,62.1 37.049,61.7 37.6,61.7 38.223,61.077 38.223,60.521 3.11 38.25,59.25 3.25 ; v1(40.058,51.942) C6.1 ; 3.25@40.301,57.25 3.1 ; C5.1 41.109,37.683 41.109,37.794 41.71,38.395 41.71,39.29 U2.18 ; U2.63 41.775,50.645 41.775,49.325 v1(41.8,49.3) ; C8.1 43.262,35.962 43.723,36.423 43.923,36.423 v1(44,36.5) ; v1@48.25,40.65 U2.31 48.25,37.891 48.538,37.603 C4.1 48.484,37.539 48.484,36.354 C9.1 ; U2.47 50.71,48.29 51.49,48.29 52.082,48.882 52.429,48.882 52.448,48.901 53.634,48.901 C7.1 ; C22.1 v1(54.6,37.5) ; v1@55.4,41.7 55.655,41.955 55.978,41.955 ; C23.1 v1(57.8,34.4) ; U5.2 60.356,53.9 C21.1@60.6,54.144
  Top Layer w0.3: J2.SH2 29.052,36.175 v1(29.376,36.499) ; J2.SH1 28.951,43.625 v1(29.376,43.199) ; J3.S2 29.027,46.85 v1(29.376,47.199) ; J3.S1 29.094,56.8 29.295,56.599 v1(29.376,56.599) ; v1(28.776,41.799) 28.788,41.787 J2.1@30.463,41.787 ; v1(30.3,32) R1.1 ; J3.1 31.2,55 31.2,54.975 v1@32.175,54.975 ; v1(32.6,30.6) 32.605,30.595 U1.4 ; v1(33.4,48.3) Y1.2 ; C17.1 v1(35.5,57.8) 36.05,57.25 3.18 37.029,57.273 37.722,57.273 38.949,58.5 3.25 ; v1(35.976,43.599) 36.058,43.599 36.276,43.381 C3.1 37.837,43.381 37.968,43.25 U2.12 ; v1@36,44.5 36.49,44.5 C10.2@36.99,45 ; v1(36.1,54.8) 36.107,54.807 36.861,54.807 C12.1 ; C15.1 v1(37.788,64.088) v1@37.8,64.1 ; v1(38.9,63) 39,62.9 C13.1 ; v1(39.176,55.099) 39.176,54.479 C1.1 ; v1@39.88,37.596 40.916,37.596 C5.1@40.959,37.639 ; R2.1 44.353,33.528 44.353,34.453 v1(44.381,34.481) ; J4.SH1 44.69,27.34 45.86,27.34 v1@45.9,27.3 ; v1@45,58 D1.C ; v1(49,48.2) 49.04,48.24 50.66,48.24 U2.47 ; C20.1@52.895,54.337 v1@52.895,55.392 ; C7.1@53.662,48.919 53.781,48.8 v1(54.6,48.8) ; C19.1@54.294,53.968 v1@54.294,54.994 ; v1(55.8,27.3) 55.803,27.303 56.144,27.303 56.148,27.3 J4.SH2 ; 55.978,41.955 R5.2 57.042,41.955 57.386,42.3 J1.1 59.04,42.3 59.15,42.19 59.15,41.105 J1.S3 ; R6.2 v1(56.1,50.7) ; U6.2 60.551,36.95 60.646,36.856 C18.1 v1@61.618,36.818 ; v1@58.7,59.6 R4.1 ; U6.2@58.75,36.9 U6.2@58.775,36.925 ; J1.12 59.04,48.5 59.15,48.61 59.15,49.695 J1.S4 ; D2.C@60.108,33.208 v1(61.353,33.208) ; C21.1@60.6,54.144 C21.1 ; J1.S5 J1.S1 ; J1.S2 J1.S6
  Bottom Layer w0.2: v1(49.6,35.6) 49.677,35.523 49.677,35.287 50.449,34.514 50.449,34.502 U4.3 ; C14.1 52.493,31.593 v1(53,32.1) ; U4.5@51.488,34.461 51.528,34.422 53.259,34.422 C16.1@53.288,34.393 ; v1(53.276,35.299) 53.288,35.287 C16.1@53.288,34.393 ; C16.1 C16.1@53.288,34.393 ; CR1.2 56,46.8 ; 56,46.791 C11.1@56.69,46.791 ; C11.1 C11.1@56.69,46.791 ; v1(57.1,48) 56.69,47.59 C11.1@56.69,46.791
  Bottom Layer w0.3: U4.9 U4.8 51.496,32.938 52.277,32.157 52.943,32.157 v1(53,32.1)
  other v1: 45.89,27.34 61.639,36.79 39.876,37.599 48.251,40.721 55.302,41.757 35.976,44.499 59.586,53.87 32.168,54.959 54.3,55 52.889,55.397 45.015,57.99 58.676,59.599
GYRO_INT: 3.12 U2.20 | length 40.1
  Top Layer w0.2: v1(34,56.9) 34,60.2 35,61.2 37.273,61.2 37.75,60.722 3.12 ; U2.20 42.75,40.434 v1(43.442,41.125)
  Bottom Layer w0.2: v1(34,56.9) 34,54.6 41.3,47.3 47.9,47.3 49.1,46.1 49.1,43.6 46.625,41.125 v1(43.442,41.125)
I2C1_SCL: 3.23 R8.1 U2.58 | length 10.5
  Top Layer w0.2: 3.23 39.75,55.85 40.3,55.3 44.3,55.3 44.756,54.844 R8.1 44.756,52.456 44.25,51.95 U2.58
I2C1_SDA: 3.24 R7.1 U2.59 | length 9.8
  Top Layer w0.2: 3.24 40.25,56.277 40.728,55.8 42.9,55.8 v1(43.5,56.4) ; v1(43.5,54.6) 43.5,52.975 43.75,52.725 U2.59
  Bottom Layer w0.2: v1(43.5,54.6) v1(43.5,56.4)
I2C2_SCL: R9.1 U2.28 U4.2 | length 8
  Top Layer w0.2: U2.28 46.71,39.29 46.71,35.435 R9.1 47.733,34.944 v1(48.271,34.407)
  Bottom Layer w0.2: v1@48.3,34.4 49.776,34.4 U4.2
I2C2_SDA: R10.1 U2.29 U4.4 | length 11
  Top Layer w0.2: U2.29 47.25,40.95 47.7,41.4 49.083,41.4 50.455,40.027 R10.1 50.455,36.559 50.976,36.039 v1@50.976,35.923
  Bottom Layer w0.2: U4.4 50.988,35.588 51,35.6
  other v1: 50.969,35.907
I2C3_SCL: J2.4 U2.41 | length 25.9
  Top Layer w0.2: J2.4 v1@33.425,38.025 ; v1(47.8,45.8) 48.9,45.8 49.45,45.25 U2.41
  Bottom Layer w0.2: v1(33.4,38) 32.5,38.9 32.5,39.6 33.3,40.4 37.5,40.4 42.9,45.8 v1(47.8,45.8)
I2C3_SDA: J2.3 U2.40 | length 22.5
  Top Layer w0.2: J2.3 30.5,39.3 v1(33.4,39.3) ; v1(47.8,44.7) 49.918,44.7 49.928,44.71 50.63,44.71 U2.40
  Bottom Layer w0.2: v1(33.4,39.3) 38,39.3 43.4,44.7 v1(47.8,44.7)
NetC9_2: C9.2 U2.30 | length 3.1
  Top Layer w0.2: C9.2 47.57,37.434 47.75,37.614 U2.30
NetC10_1: C10.1 U2.7 | length 2.4
  Top Layer w0.2: C10.1 37.01,45.562 37.198,45.75 U2.7
NetC12_2: 3.20 C12.2 | length 1.9
  Top Layer w0.2: C12.2 37.732,54.843 38.25,55.361 3.20
NetC15_2: 3.10 C15.2 | length 2.5
  Top Layer w0.2: C15.2 37.788,62.112 38.723,61.177 38.723,60.521 3.10
NetD1_A: D1.A R3.1 | length 1.8
  Top Layer w0.3: D1.A 45,61.5 45.1,61.6 R3.1
NetD2_A: D2.A R11.1 | length 1.8
  Top Layer w0.2: R11.1 D2.A
NetJ1_3: J1.3 R5.1 | length 2.8
  Top Layer w0.2: R5.1 57.106,43.65 J1.3
NetJ1_9: J1.9 R6.1 | length 4.7
  Top Layer w0.2: R6.1 56.1,47.5 57.3,46.3 57.8,46.3 58.145,46.645 58.795,46.645 J1.9
NetR1_2: R1.2 U1.3 | length 1.6
  Top Layer w0.2: R1.2 32.474,31.933 33.932,31.933 U1.3
NetR2_2: R2.2 U1.7 | length 1.7
  Top Layer w0.2: U1.7 42.949,33.135 43.302,33.487 R2.2
NetR4_2: R4.2 SW1.1 U2.60 | length 35.7
  Top Layer w0.2: U2.60 43.275,50.645 43.275,49.425 v1(43.3,49.4) ; SW1.1 56.32,61.444 R4.2 59.855,61.444 60.6,60.7 v1(60.6,59.9)
  Bottom Layer w0.2: v1(43.3,49.4) 40.9,51.8 40.9,55.3 42.8,57.2 58.7,57.2 60.6,59.1 v1(60.6,59.9)
PWM_1: J4.1 U2.16 | length 24
  Top Layer w0.2: U2.16 39.355,41.225 40.751,41.225 v1(40.776,41.199) ; J4.1 46.604,30.396 v1(46.604,29.104)
  Bottom Layer w0.2: v1(40.776,41.199) 37.6,38.023 37.6,32.7 42.2,28.1 45.6,28.1 v1(46.604,29.104)
PWM_2: J4.2 U2.17 | length 20.7
  Top Layer w0.2: v1@38.6,37.6 39.4,38.4 40.915,38.4 41.25,38.735 U2.17 ; v1(47.8,29) J4.2@47.8,30.5
  Bottom Layer w0.2: v1(38.576,37.599) 38.576,34.124 41.5,31.2 46.7,31.2 47.8,30.1 v1(47.8,29)
PWM_3: J4.3 U2.37 | length 22.5
  Top Layer w0.2: v1(49,29) J4.3 ; U2.37 52.242,43.25 52.592,42.9 v1(52.7,42.9)
  Bottom Layer w0.2: v1(49,29) 49,29.9 45.5,33.4 45.5,36.6 51.8,42.9 v1(52.7,42.9)
PWM_4: J4.4 U2.38 | length 24
  Top Layer w0.2: v1(50.3,29) J4.4@50.3,30.5 ; U2.38 52.242,43.75 52.592,44.1 v1(52.7,44.1)
  Bottom Layer w0.2: v1(50.3,29) 50.3,29.049 49.9,29.449 49.9,30 46.6,33.3 46.6,35.5 53.7,42.6 53.7,43.7 53.3,44.1 v1(52.7,44.1)
PWM_5: J4.5 U2.25 | length 13.5
  Top Layer w0.2: U2.25 45.25,38.05 45.7,37.6 45.7,33.5 47.2,32 50.8,32 51.313,31.487 51.313,30.687 J4.5
PWM_6: J4.6 U2.26 | length 14
  Top Layer w0.2: U2.26 45.75,38.15 46.2,37.7 46.2,33.8 47.5,32.5 51.3,32.5 52.75,31.05 J4.6
PWM_7: J4.7 U2.61 | length 38.3
  Top Layer w0.2: U2.61 v1(42.75,52.3) ; v1(54,28.9) J4.7@54,30.4
  Bottom Layer w0.2: v1(42.75,52.3) 42.75,52.75 43.2,53.2 47.4,53.2 51.3,49.3 51.3,46.1 52.5,44.9 54.2,44.9 56.2,42.9 56.2,32.2 54,30 v1(54,28.9)
PWM_8: J4.8 U2.62 | length 48.8
  Top Layer w0.2: v1(41.8,52.3) 42.25,51.85 U2.62 ; v1(55.2,28.9) J4.8@55.2,30.5
  Bottom Layer w0.2: v1(41.8,52.3) 41.8,52.9 42.4,53.5 42.8,53.9 57,53.9 61.1,49.8 61.1,46.531 57.2,42.631 57.2,30.9 v1(55.2,28.9)
SPI1_MISO: U1.2 U2.22 | length 13.9
  Top Layer w0.2: U1.2 34.835,33.135 35.7,34 35.7,34.6 36.7,35.6 41.9,35.6 43.75,37.45 U2.22
  Top Layer w0.3: U1.2 U1.2@34.067,33.203
SPI1_MOSI: U1.5 U2.23 | length 11.4
  Top Layer w0.2: U1.5 43.195,30.595 45.2,32.6 45.2,36.4 44.25,37.35 U2.23
SPI1_SCK: U1.6 U2.21 | length 9.6
  Top Layer w0.2: U1.6 43.157,31.865 43.292,32 v1(43.4,32) ; v1(42.625,37.55) 43.25,38.175 U2.21
  Bottom Layer w0.2: v1(42.625,37.55) 42.625,32.775 v1(43.4,32)
UART1_RX: J3.5 U2.54 | length 22.3
  Top Layer w0.2: J3.5 32.35,49.95 33,50.6 38.8,50.6 41.6,47.8 v1(43.8,47.8) ; v1(45.6,52.4) 45.696,52.304 46.137,52.304 46.254,52.187 46.254,50.674 U2.54
  Bottom Layer w0.2: v1(43.8,47.8) 45.1,49.1 45.1,51.9 45.5,52.3 v1@45.6,52.3
UART1_TX: J3.4 U2.53 | length 18.9
  Top Layer w0.2: J3.4 39,51.2 41.8,48.4 45.4,48.4 46.75,49.75 U2.53
UART2_RX: U2.15
UART2_TX: U2.14
USB_N: CR1.4 J1.5 J1.8 U2.44 | length 14.7
  Top Layer w0.11: U2.44 52.05,46.75 v1(52.3,46.5) 52.631,46.831 55.655,46.831 57.705,44.781 58.304,44.781 58.435,44.65 59.986,44.65 60.437,45.102 60.437,45.341 60.437,45.58 60.281,45.736 59.998,46.019 59.487,46.019 59.355,46.15 J1.8
  Bottom Layer w0.11: v1(52.3,46.5) 52.889,46.5 53.089,46.3 CR1.4
USB_P: CR1.5 J1.6 J1.7 U2.45 | length 13.7
  Top Layer w0.11: U2.45 52.15,47.25 v1(52.3,47.4) 52.631,47.069 55.753,47.069 57.803,45.019 58.304,45.019 58.435,45.15 59.355,45.15 59.405,45.1 60.1,45.1 60.2,45.2 60.2,45.341 60.2,45.481 59.945,45.736 59.9,45.781 59.693,45.781 59.487,45.781 59.355,45.65 J1.7
  Bottom Layer w0.11: v1(52.3,47.4) 52.4,47.3 CR1.5
VBUS: C11.2 C18.2 C21.2 CR1.3 J1.2 J1.11 U5.1 U5.3 U6.1 U6.3 | length 9
  Top Layer w0.3: v1(57.7,47.1) 58.24,47.64 58.69,47.64 J1.11 ; U5.3@58.227,54.777 U5.3@58.3,54.85 ; U5.3 60.585,54.85 60.6,54.835 C21.2 ; U6.1 58.606,36.006 59.71,36.006 59.886,36.183 C18.2 ; U6.3 U6.3@58.613,37.914
  Bottom Layer w0.2: CR1.3 55.165,46.286 56.633,46.286 C11.2
  Bottom Layer w0.3: C11.2 56.74,46.259 56.922,46.259 57.7,47.037 v1(57.7,47.1)
XO_IN: U2.5 Y1.1 | length 5.9
  Top Layer w0.2: Y1.1 35.1,49.4 36.1,49.4 36.5,49 36.5,48.3 38.05,46.75 U2.5
XO_OUT: U2.6 Y1.3 | length 4.7
  Top Layer w0.2: Y1.3 36.3,47.1 37.15,46.25 U2.6
pads on no net: 3.2 3.3 3.4 3.5 3.6 3.7 3.9 3.14 3.15 3.16 3.17 3.19 3.21 3.22 CR1.1 J1. J1.4 J1.10 J3.2 J3.3 U1.9 U2.2 U2.3 U2.4 U2.8 U2.9 U2.10 U2.11 U2.24 U2.27 U2.35 U2.36 U2.39 U2.42 U2.43 U2.46 U2.49 U2.50 U2.51 U2.52 U2.55 U2.56 U2.57 U5.4 U6.4

## Polygon pours and split planes (outlines as drawn)
VBUS on Top Layer "3V3_A_L01_P-001" (solid, remove dead copper, pour order 5): 59.2,36.5 59.2,35.5 57.6,35.5 57.4,35.7 57.4,38.2 57.7,38.5 59.4,38.5 60.7,39.8 60.7,42.2 60.2,42.7 58.2,42.7 58.2,43.4 60.2,43.4 60.7,43.9 60.7,46.8 60.1,47.4 58.2,47.4 58.2,48.1 60.1,48.1 60.7,48.7 60.7,51.9 60,52.6 57.3,52.6 56.8,53.1 56.8,54.9 57.1,55.2 59,55.2 59,54.5 57.4,54.5 57.4,53.6 57.6,53.4 60.4,53.4 61.5,52.3 61.5,39.3 59.7,37.5 57.9,37.5 57.8,37.4 57.8,36.5
3V3_A on Top Layer "3V3_A_L01_P-001" (solid, remove dead copper, pour order 4): 54.3,36.3 55.2,36.3 55.4,36.5 57.1,36.5 57.2,36.4 57.2,35.5 57.1,35.4 56.3,35.4 56.3,32.9 56.1,32.7 48.8,32.7 48.5,33 48.5,33.7 48.8,34 49.6,34 49.9,33.7 49.9,33.4 50.1,33.2 55.2,33.2 55.4,33.4 55.4,35.6 54.4,35.6 54.2,35.8 54.2,36.2
GND on GND "3V3_A_L01_P-001" (solid, remove dead copper, pour order 0): 25.7,62.8 25.7,63.648 cw(c28.24,63.648) 26.444,65.444 27.556,66.556 cw(c29.352,64.76) 29.352,67.3 60.848,67.3 cw(c60.848,64.76) 62.644,66.556 64.056,65.144 cw(c62.26,63.348) 64.8,63.348 64.8,29.452 cw(c62.26,29.452) 64.056,27.656 62.3,25.9 cw(c61.576,26.624) 61.576,25.6 28.952,25.6 cw(c28.952,28.14) 27.156,26.344 26.244,27.256 cw(c28.04,29.052) 25.5,29.052 25.5,29.7
3V3 on VCC "3V3_A_L01_P-001" (solid, remove dead copper, pour order 2): 25.8,63.448 cw(c28.34,63.448) 26.544,65.244 27.756,66.456 cw(c29.552,64.66) 29.552,67.2 60.548,67.2 cw(c60.548,64.66) 62.344,66.456 63.756,65.044 cw(c61.96,63.248) 64.5,63.248 64.5,29.452 cw(c61.96,29.452) 63.756,27.656 62.544,26.444 cw(c60.748,28.24) 60.748,25.7 29.752,25.7 cw(c29.752,28.24) 27.956,26.444 26.3,28.1 cw(c27.507,29.307) 25.8,29.307 25.8,30

## Silkscreen, mask and mechanical layers (free items; w line width, h text height)
Top Overlay:
  text "Flght Controller rev V1.1 L.Z" at 31.4,26.887 h1
Mechanical 1:
  the board outline again, w0.001

## Text inside footprints (layer, text, board x,y; h text height)
3: Top Overlay "*" at 42.8,57.3 h1.27 r180; Mechanical 13 "*" at 40.956,57.635 h1.27 r180
J1: Mechanical 13 "PCB EDGE" at 64.65,50.9 h0.61 r90
U4: Mechanical 13 "*" at 50.061,33.835 h1.27 r180; Bottom Overlay "*" at 49.1,32.5 h1.27 r180